# Altium PCB TDA2003.PcbDoc
Units mm, origin at the board's own origin, x right, y up, seen from the top; angles counter-clockwise.
Board outline 80.85 x 34.32 mm, 2 copper layers (Top Layer, Bottom Layer); 15 components, 11 nets, 38 pads, 0 vias.
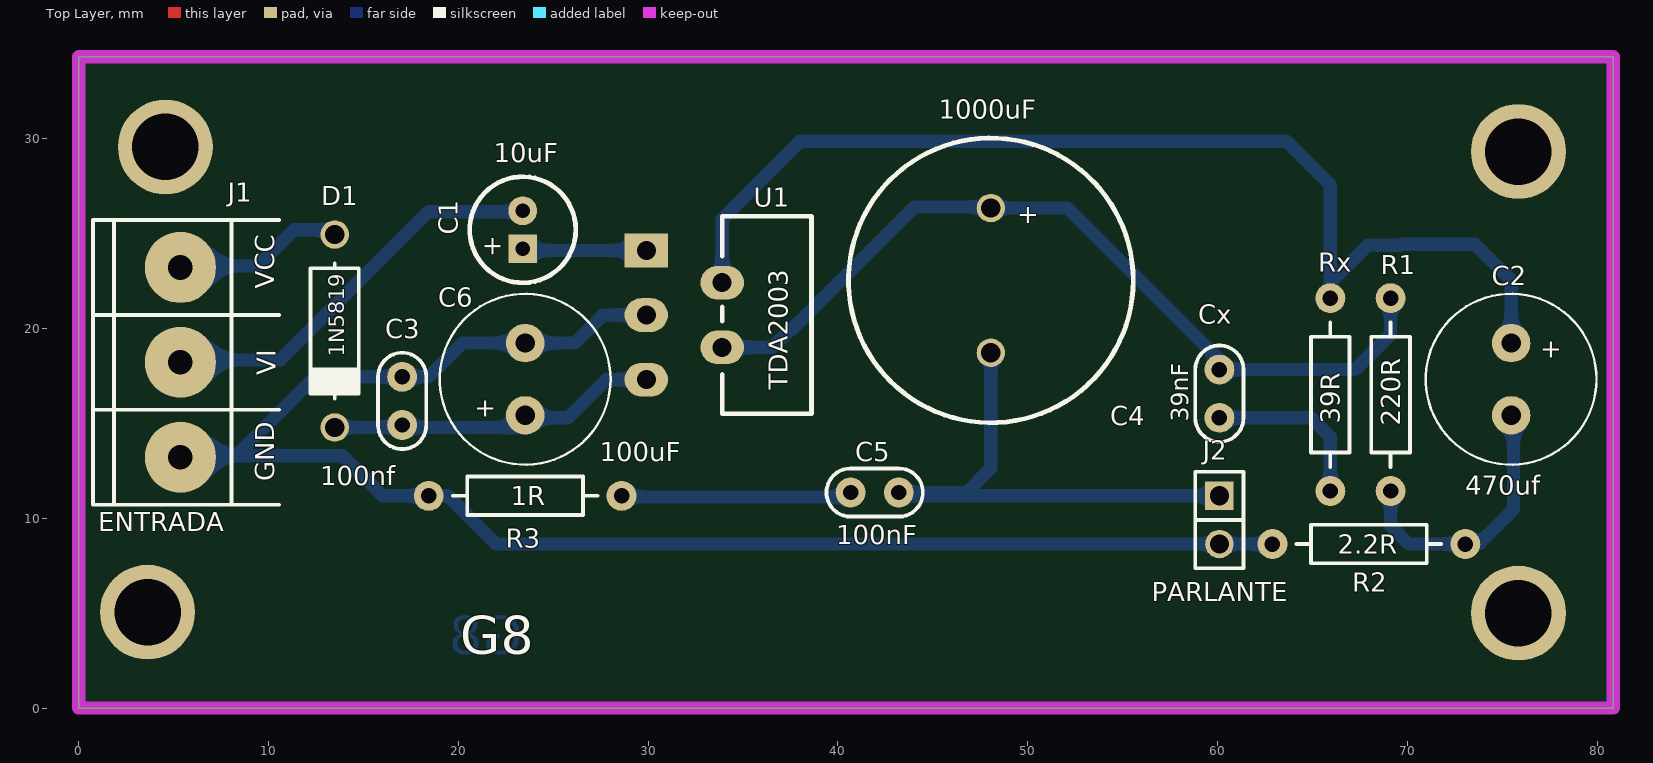
[diagram p0: Top Layer view]
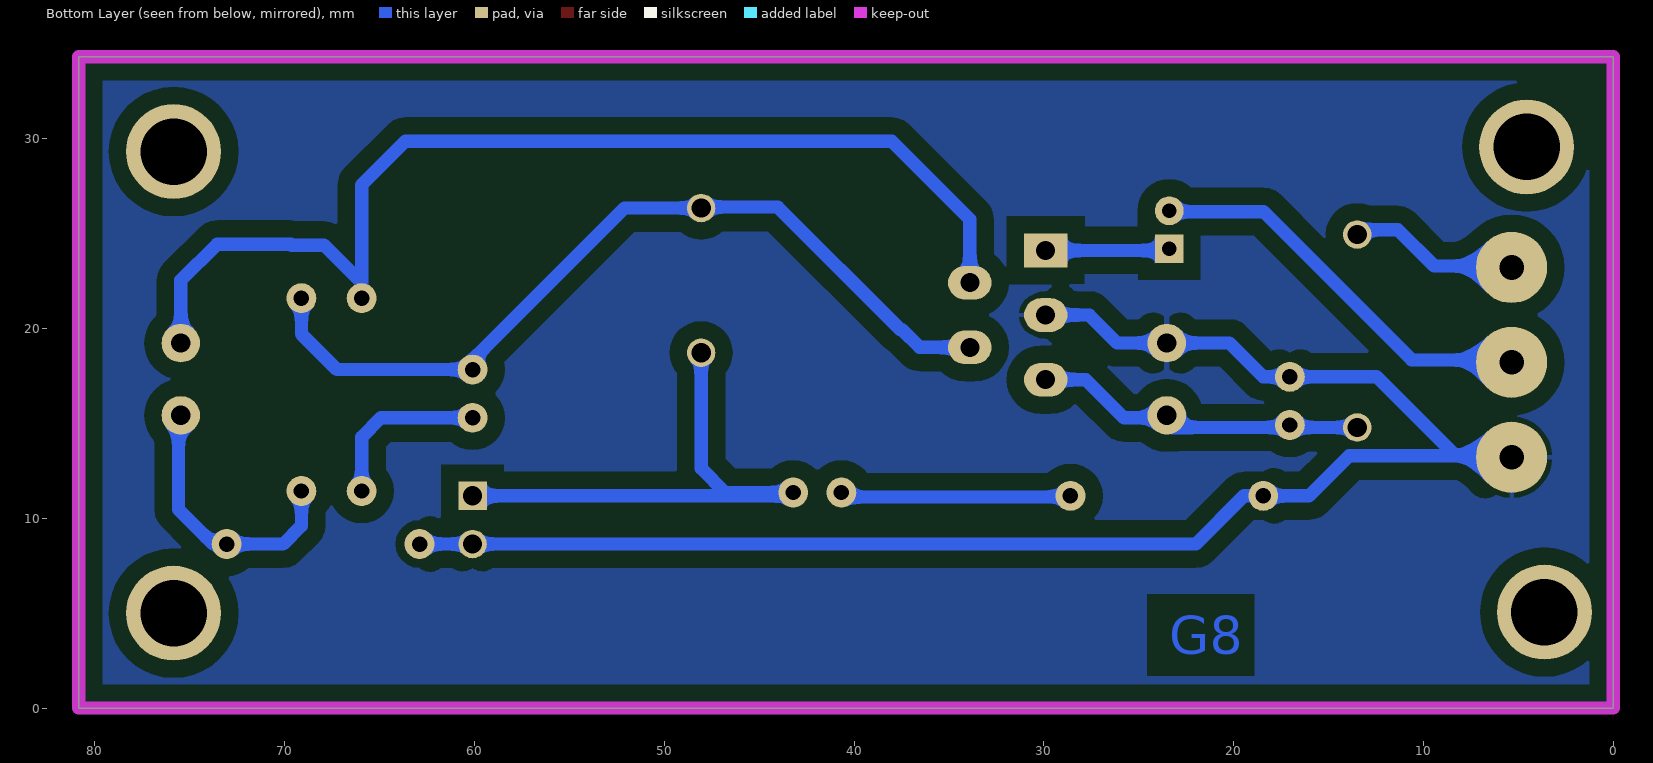
[diagram p1: Bottom Layer view, seen from below]
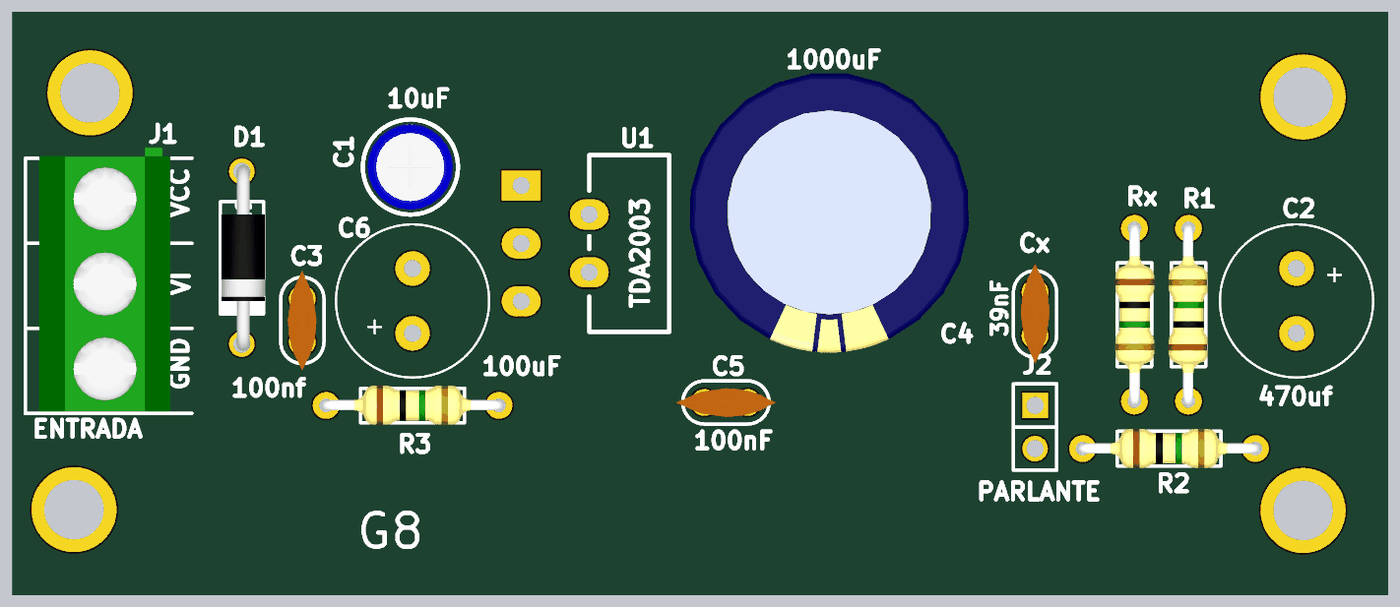
[diagram p2: 3D render of the assembled board from above, using the file's embedded part models]

## Layer stack, top to bottom
Top Solder: solder mask 0.0102, Solder Resist, Dk 3.5
Top Layer: signal copper 0.0356
Dielectric 1: dielectric 0.32, FR-4, Dk 4.8
Bottom Layer: signal copper 0.0356
Bottom Solder: solder mask 0.0102, Solder Resist, Dk 3.5

## Board outline
0,0 0,34.315 80.848,34.315 80.848,0

## Design rules (kind name [scope] priority, off if disabled: settings)
Clearance Clearance_1 [InPolygon] p1: gap=0.9
Clearance [All] p2: gap=0.3
PolygonConnect [All] p1: connectstyle=Relief reliefconductorwidth=0.254 reliefentries=4 polygonreliefangle="90 Angle" airgapwidth=0.254
RoutingVias [All] p1: holewidth=0.711 width=1.27 viastyle="Through Hole" minholewidth=0.711 minwidth=1.27 maxholewidth=0.711 maxwidth=1.27
SolderMaskExpansion [All] p1: expansion=0.102
UnpouredPolygon [All] p1: allowunpoured=FALSE
Width [All] p1: maxlimit=0.7 minlimit=0.254 preferedwidth=0.7 toplayer_maxwidth=0.254 toplayer_prefwidth=0.254 bottomlayer_minwidth=0.7 minimp=50.000000 maximp=50.000000 favimp=50.000000
29 further rules are at their usual default settings.

## Classes and differential pairs
component class TDA2003: C1 C2 C3 C5 C6 Cx D1 J1 J2 R1 R2 R3 Rx U1

## Components (designator, comment, footprint, x,y, rotation, side; value= is the part's Value field where it differs from the comment)
C1 "10uF" CAP100RP 23.393,25.197 r90 top
C2 "470uf" CAP300/150 75.463,17.323 r270 top
C3 "100nf" CAP100 17.043,16.18 r90 top
C4 "1000uF" CAP400RP 48.057,22.53 r270 top
C5 "100nF" CAP100 41.935,11.354 r180 top
C6 "100uF" CAP300/150 23.52,17.323 r90 top
Cx "39nF" CAP100 60.096,16.561 r270 top
D1 "1N5819" DO41 13.487,19.863 r270 top
J1 "ENTRADA" BORNERA3 5.359,18.212 r0 top
J2 "PARLANTE" SIP2 60.096,9.909 r270 top
R1 "220R" RES400 69.113,11.433 r90 top
R2 "2.2R" RES400 62.89,8.639 r0 top
R3 "1R" RES400 18.44,11.179 r0 top
Rx "39R" RES400 65.938,21.593 r270 top
U1 "TDA2003" TO220B 31.902,20.704 r270 top

## Footprints (in the part's own frame and the unit in brackets; to place one, negate y for a bottom-side part, rotate by r counter-clockwise, add the part's x,y. Pads: shape width x height; smd on the part's side, far side on the other; paste and mask are expansions set on the pad)
BORNERA3 [mm] "Bornera con Tornillos 5mm separación"
  round 3.75 hole 1.3: 1(0,5) 2(0,0) 3(0,-5)
  silkscreen extent -4.6,-7.5 5.2,7.5, body extent -3.76,-7.39 3.94,8.11, height 10.05
CAP100 [mil]
  round 62 hole 32: 1(-50,0) 2(50,0)
  silkscreen extent -100,-50 100,50, body extent -115,-33 115,34, height 241
CAP100RP [mil] "Body diameter 5mm"
  rect 60x60 hole 30: 1(-39.37,0)
  round 60 hole 30: 2(39.37,0)
  silkscreen extent -110,-110 110,110, body extent -99,-99 99,100, height 454
CAP300/150 [mil]
  round 80 hole 40: 1(-75,0) 2(75,0)
  silkscreen extent -177,-177 177,177
CAP400RP [mm]
  round 1.5 hole 1.016: 1(-3.81,0) 2(3.81,0)
  silkscreen extent -7.5,-7.5 7.5,7.5, body extent -8.23,-8.28 8.25,8.18, height 25.5
DO41 [mm]
  round 1.5 hole 1.016: 1(-5.08,0) 2(5.08,0)
  silkscreen extent -3.56,-1.27 3.56,1.27, body extent -5.46,-1.19 5.46,1.37, height 2.03
RES400 [mil]
  round 62 hole 32: 1(0,0) 2(400,0)
  silkscreen extent 50,-40 350,40, body extent -12,-45 412,46, height 96
SIP2 [mm]
  rect 1.5x1.5 hole 1.016: 1(-1.27,0)
  round 1.5 hole 1.016: 2(1.27,0)
  silkscreen extent -2.54,-1.27 2.54,1.27
TO220B [mil]
  rect 70x90 hole 39.37: 1(-134,-78.74)
  oval 70x90 hole 39.37: 2(-67,78.74) 3(0,-78.74) 4(67,78.74) 5(134,-78.74)
  silkscreen extent -205,79 205,264

## Part data
C1 C2 C4 C6: library part CAPPOL
C3 C5 Cx: library part CAP
D1: library part DIODO
J1: library part "BORNERA 3"
J2: library part CON2
R1 R2 R3 Rx: library part RES
U1: "TDA2003 + DISIPADOR, MICA Y TORNILLO"

## Free pads (board coordinates)
  round 5 hole 3.5: 0(3.628,5.051) 0(4.568,29.559) 0(75.848,5) 0(75.848,29.315)

## Nets (pads, with @x,y where several pads share a name; then routed paths per layer and width w, separated by ;. In a path a pad name is that pad's centre, name@x,y a point inside that pad or via, vN(x,y) a via of type N, cw(c..) or ccw(c..) an arc to the next point about the centre after c; other vN are vias at no path point)
GND: C3.2 C6.2 J1.3 J2.2 R2.1 R3.1 U1.3 | length 86.5
  Bottom Layer w0.7: J1.3@5.131,13.335 8.357,13.335 12.471,17.45 C3.2 18.44,17.45 20.218,19.228 C6.2 26.137,19.228 27.613,20.704 U1.3 ; J1.3@6.121,13.291 13.915,13.291 16.027,11.179 19.456,11.179 21.996,8.639 J2.2 R2.1
NetC1_1: C1.1 U1.1 | length 6
  Bottom Layer w0.7: C1.1@23.901,24.149 23.943,24.107 U1.1
NetC2_1: C2.1 Rx.1 U1.2 | length 58.2
  Bottom Layer w0.7: U1.2 33.902,25.749 38.017,29.864 63.634,29.864 65.938,27.559 65.938,22.403 ; Rx.1 65.938,22.403 ; C2.1@75.463,19.482 75.463,22.53 73.558,24.435 69.669,24.435 69.621,24.387 67.922,24.387 65.938,22.403
NetC2_2: C2.2 R1.1 R2.2 | length 13.8
  Bottom Layer w0.7: R1.1 69.113,9.607 70.081,8.639 R2.2 ; R2.2@73.764,8.639 75.59,10.465 C2.2@75.59,15.545
NetC4_1: C4.1 Cx.1 R1.2 U1.4 | length 44.5
  Bottom Layer w0.7: U1.4 36.551,19.002 37.474,19.926 37.553,19.926 44.018,26.391 48.006,26.391 C4.1 52.095,26.34 60.604,17.831 62.763,17.831 67.239,17.831 69.113,19.705 R1.2
NetC4_2: C4.2 C5.1 J2.1 | length 28.4
  Bottom Layer w0.7: C4.2 48.057,12.624 46.787,11.354 C5.1 43.38,11.179 J2.1
NetC5_2: C5.2 R3.2 | length 11.9
  Bottom Layer w0.7: R3.2@28.854,11.131 C5.2@40.792,11.1
NetCx_2: Cx.2 Rx.2 | length 9.1
  Bottom Layer w0.7: Cx.2 64.922,15.291 65.938,14.275 Rx.2
NetD1_1: D1.1 J1.1 | length 8.8
  Bottom Layer w0.7: J1.1@4.851,23.291 9.448,23.291 11.354,25.197 D1.1@12.852,25.197
VCC: C3.1 C6.1 D1.2 U1.5 | length 17.6
  Bottom Layer w0.7: D1.2 22.885,14.783 C6.1 23.647,15.291 25.781,15.291 27.79,17.3 U1.5
VI: C1.2 J1.2 | length 22.5
  Bottom Layer w0.7: J1.2@5.486,18.339 10.614,18.339 18.424,26.149 C1.2@23.393,26.149 ; J1.2@6.121,18.291 7.518,18.291

## Polygon pours and split planes (outlines as drawn)
GND on Bottom Layer "POLYGON" (solid, remove dead copper, pour order 4): -2.591,36.043 83.363,36.043 83.541,36.22 81.763,34.442 81.763,-1.854 -1.753,-1.854 -2.184,-1.422

## Keep-outs
Keep-Out Layer:
  the board outline again, w0.7

## Other copper
Bottom Layer:
  text "G8" at 23.393,2.845 h2

## Silkscreen, mask and mechanical layers (free items; w line width, h text height)
Top Overlay:
  text "VCC" at 10.312,22.101 h1 r90
  text "VI" at 10.389,17.526 h1 r90
  text "GND" at 10.312,11.941 h1 r90
  text "G8" at 20.091,2.845 h2

## Text inside footprints (layer, text, board x,y; h text height)
C1: Top Overlay "+" at 22.225,23.749 h1 r90
C2: Top Overlay "+" at 76.987,18.466 h1
C4: Top Overlay "+" at 49.454,25.552 h1
C6: Top Overlay "+" at 21.996,16.18 h1 r180